# Altium PCB KS2E-IMD-AMS-LATCH.PcbDoc
Units mm, origin at the board's own origin, x right, y up, seen from the top; angles counter-clockwise.
Board outline 47 x 41 mm, 4 copper layers (Top Copper, Signal Layer 1, Signal Layer 2, Bottom Copper), stack 1.57 mm thick; 24 components, 21 nets, 74 pads, 7 vias.
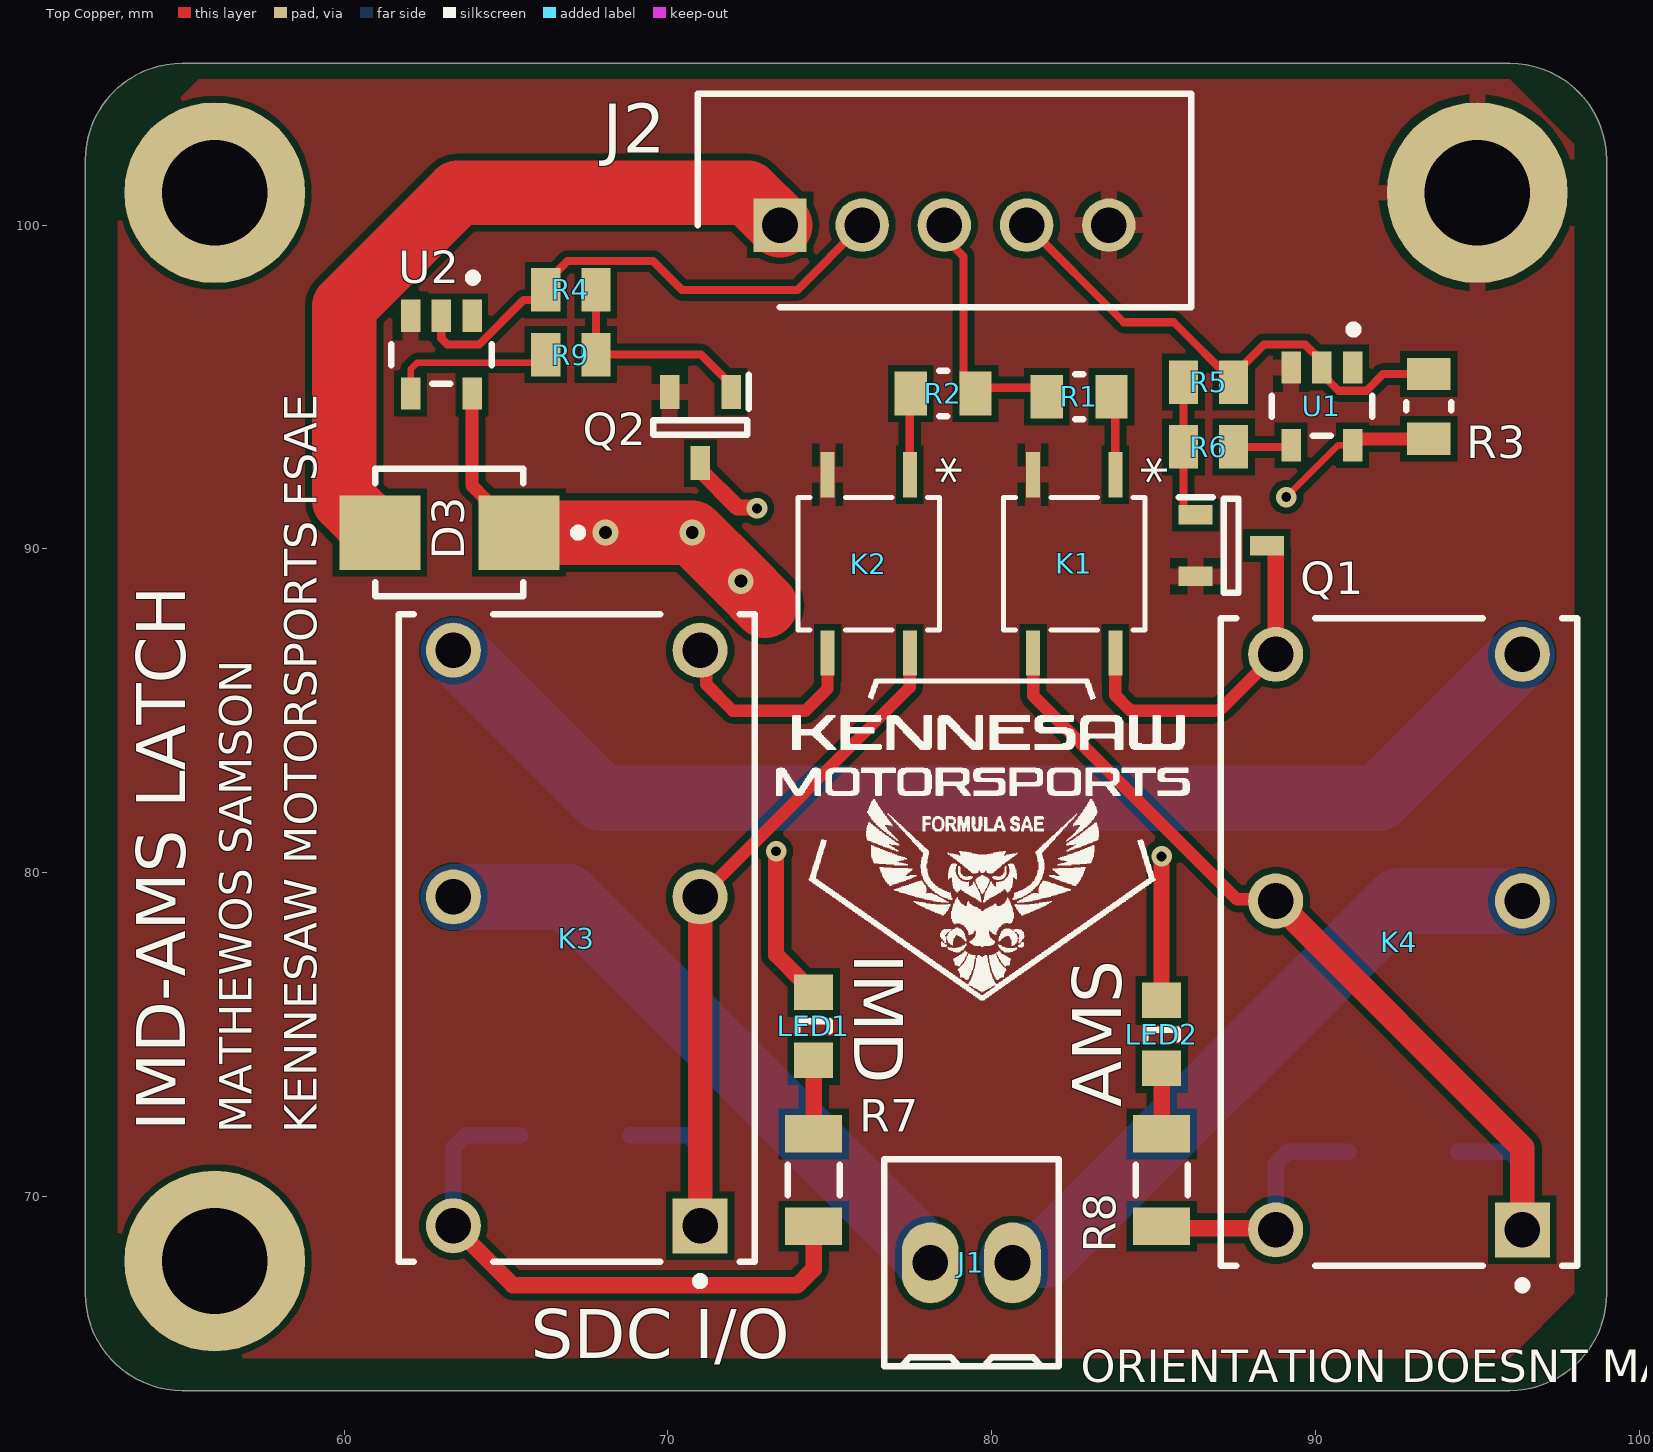
[diagram p0: Top Copper view]
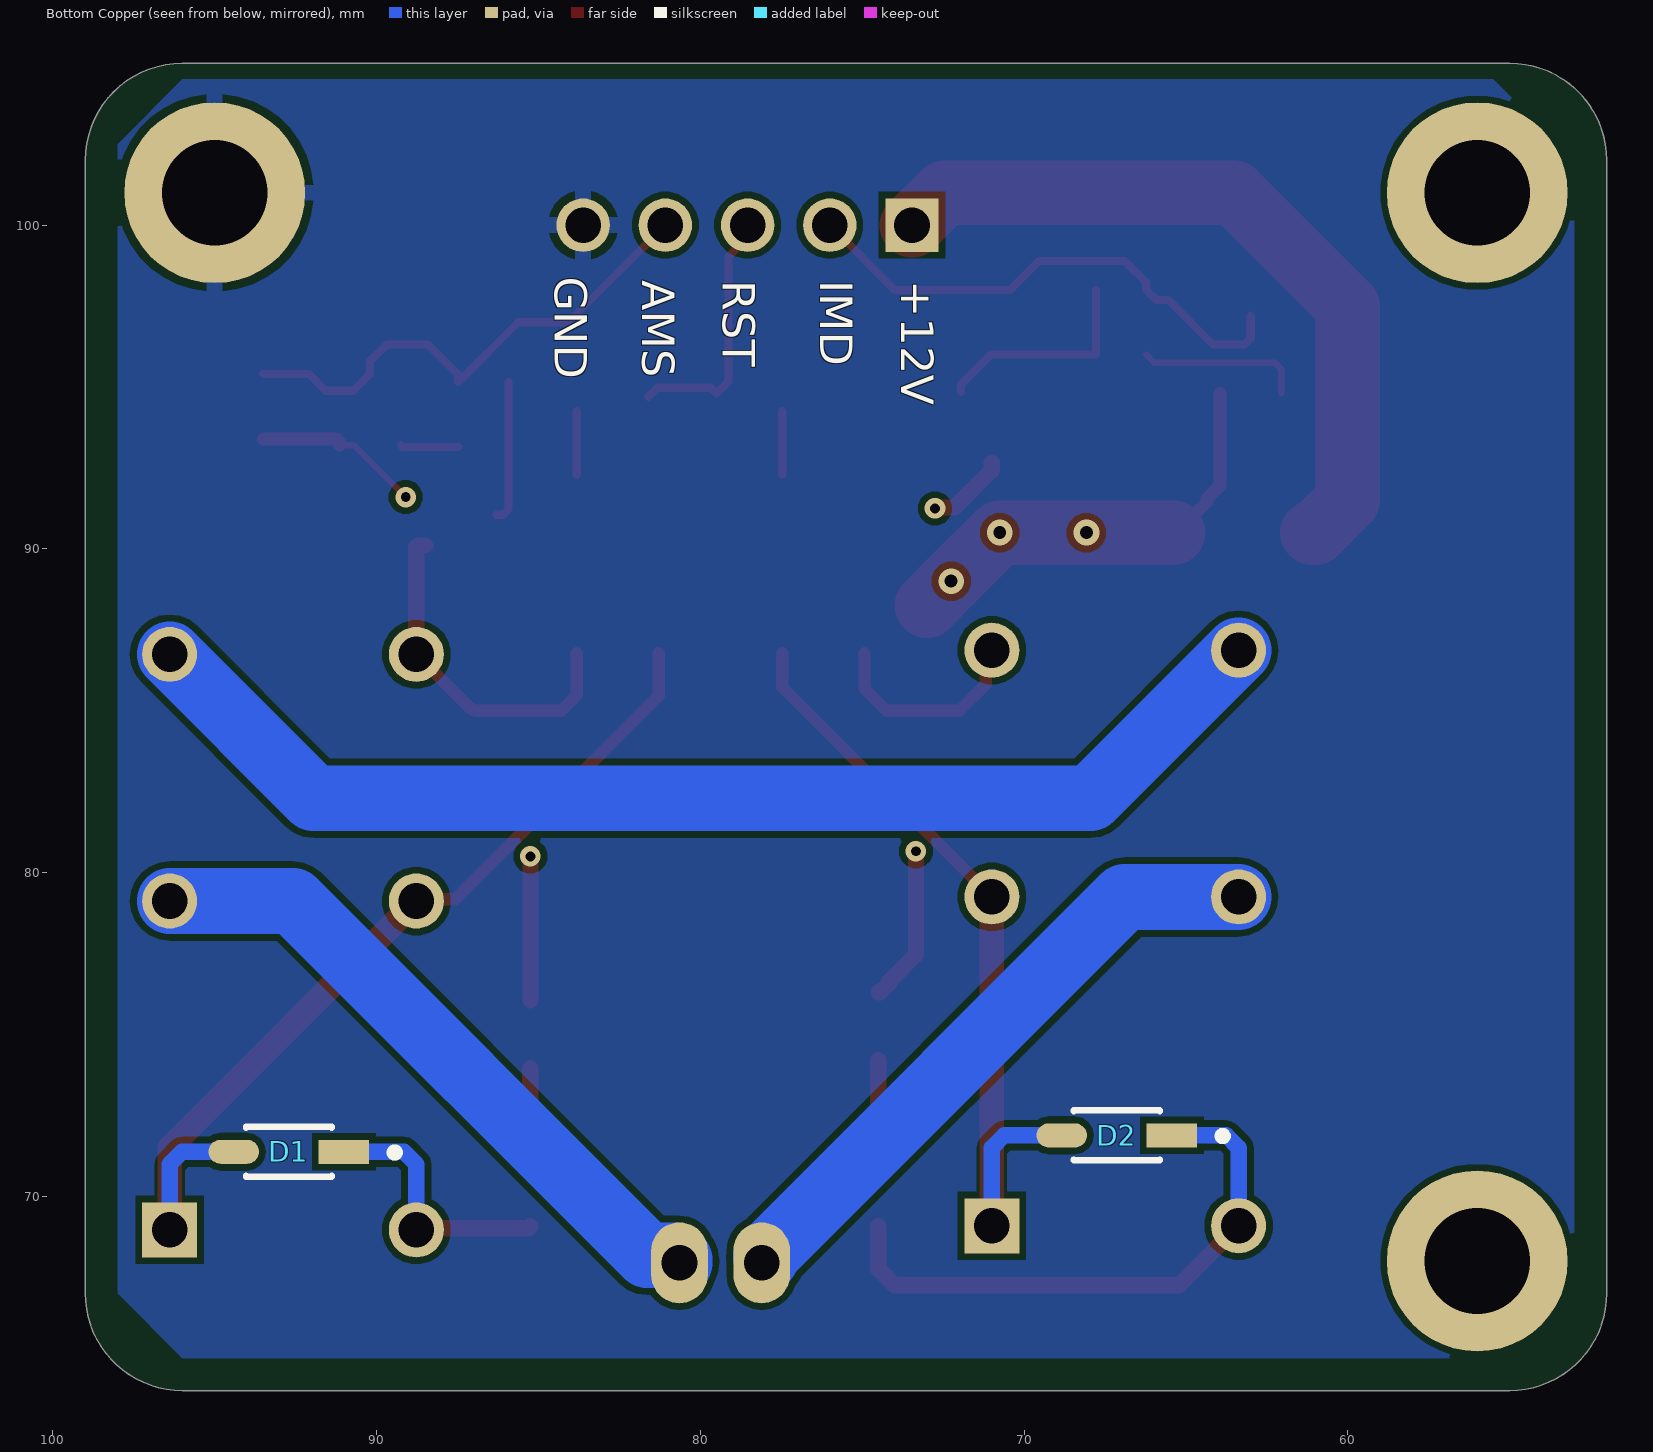
[diagram p1: Bottom Copper view, seen from below]
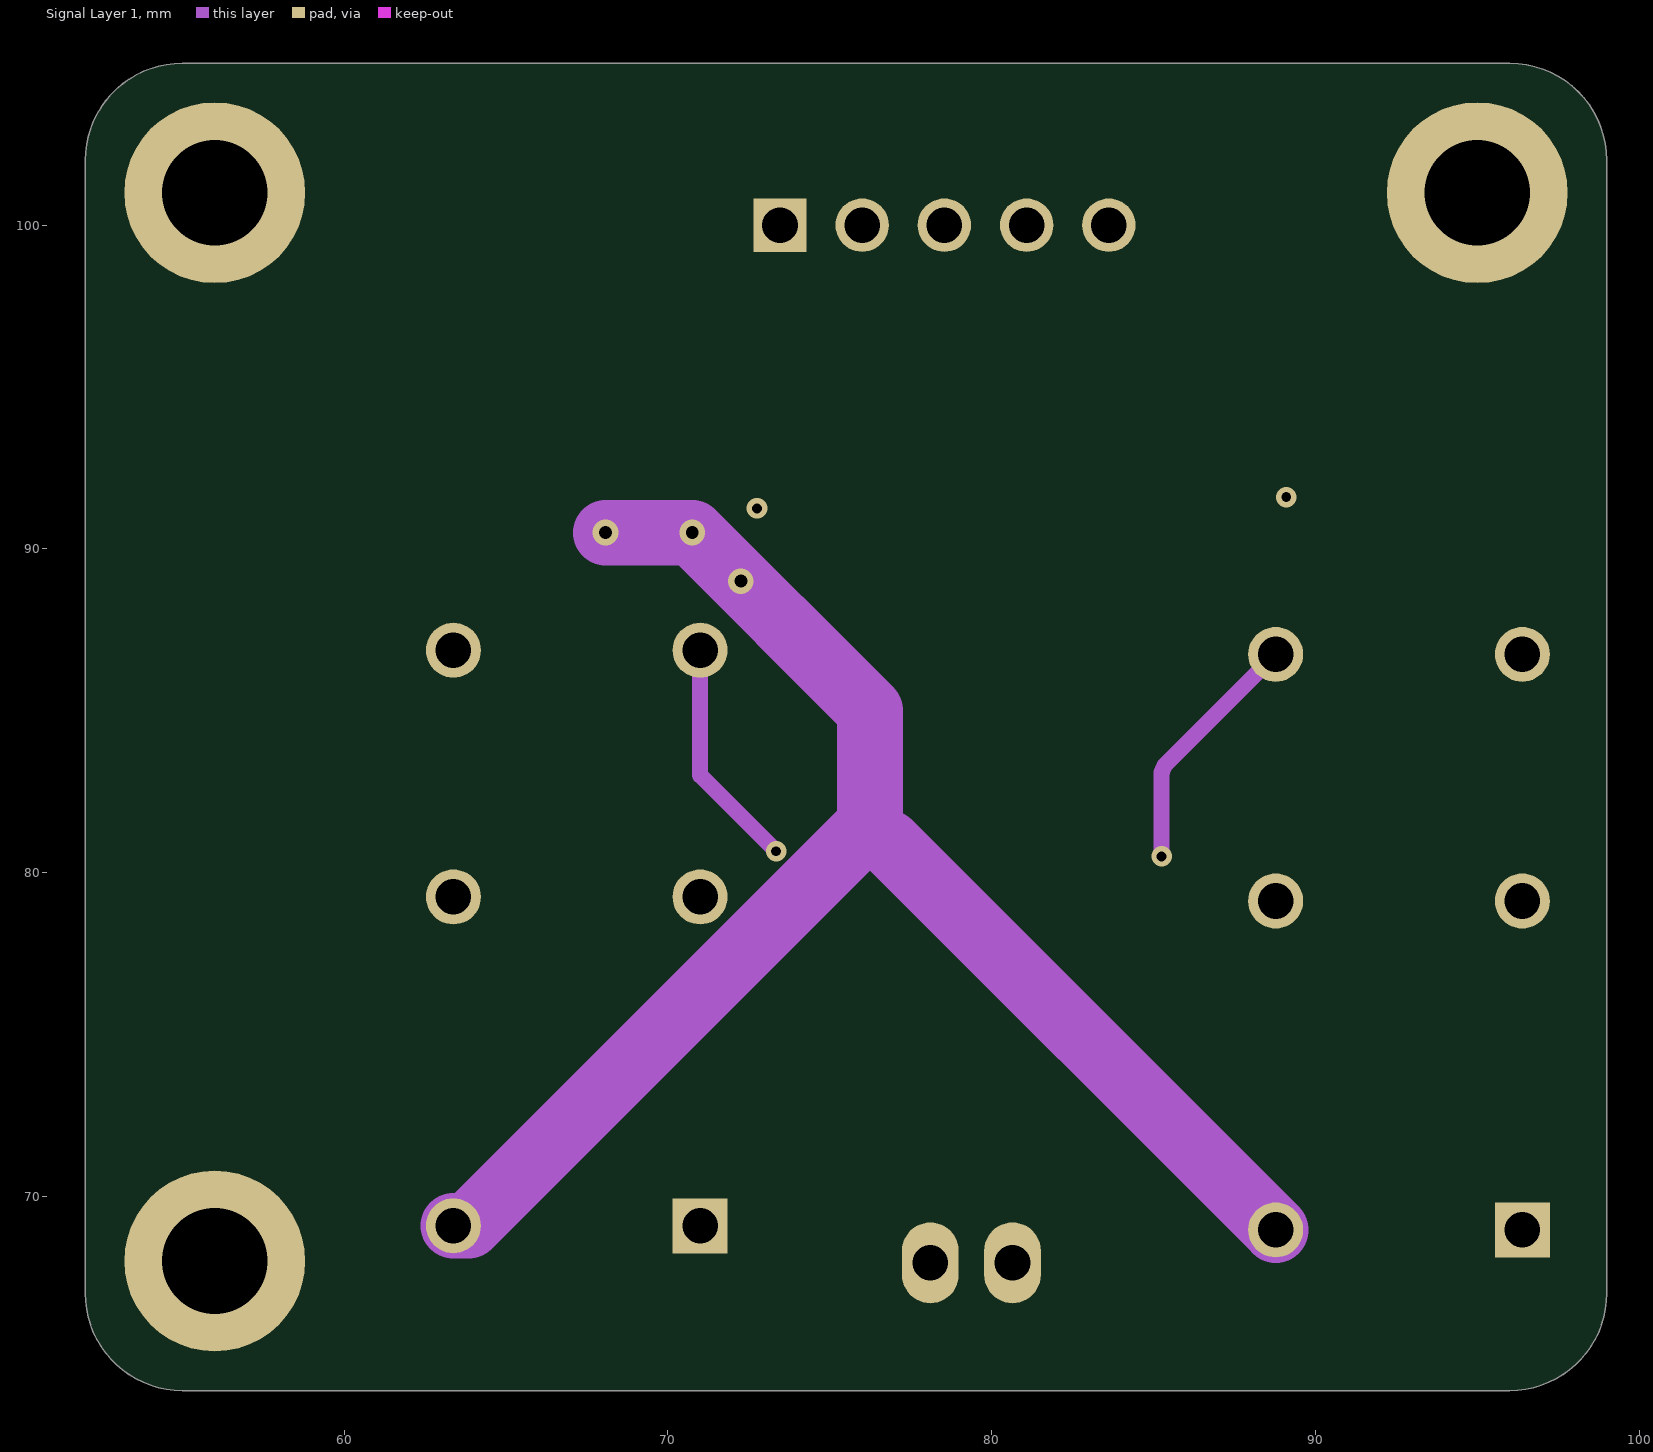
[diagram p2: Signal Layer 1]
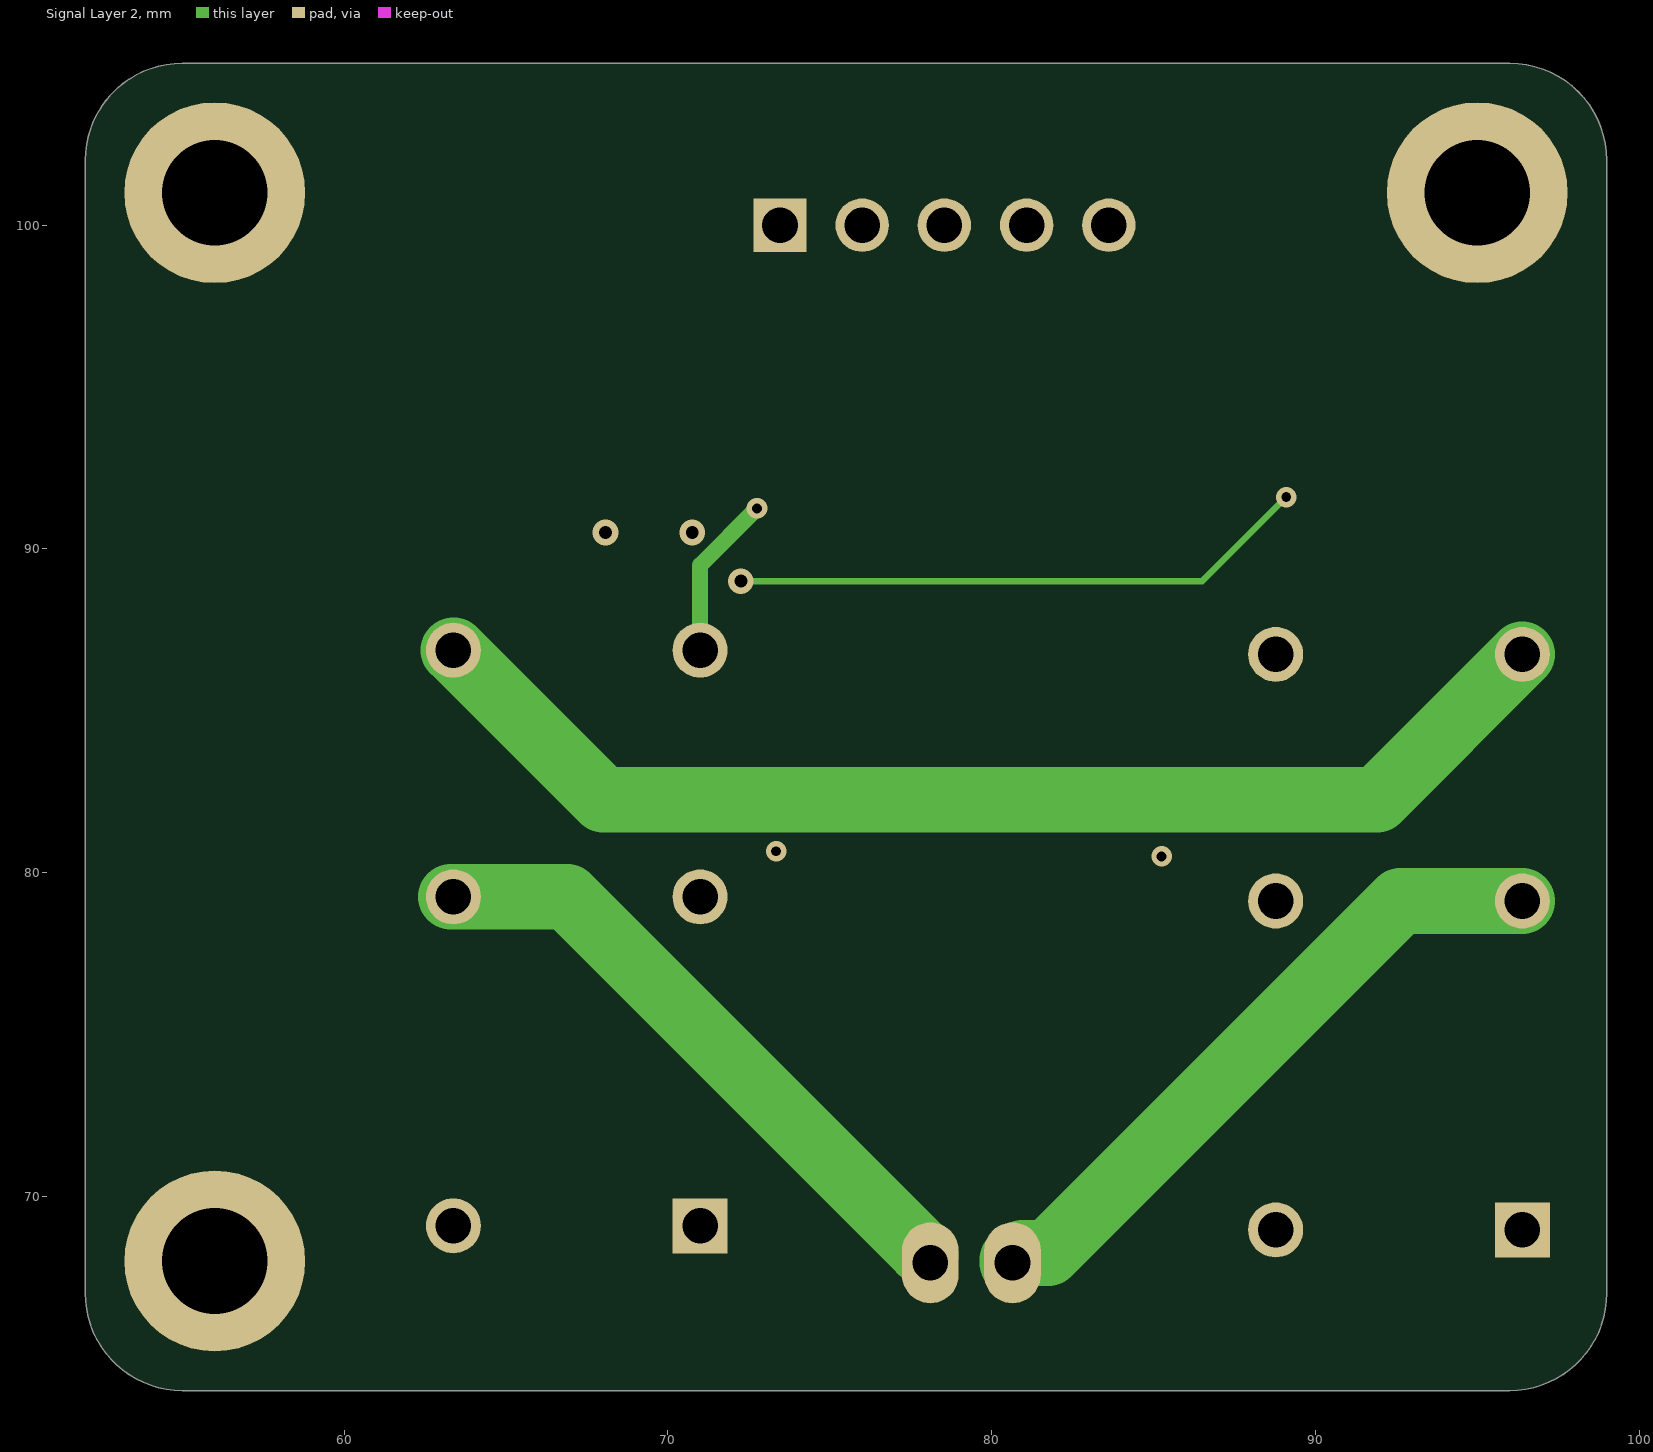
[diagram p3: Signal Layer 2]
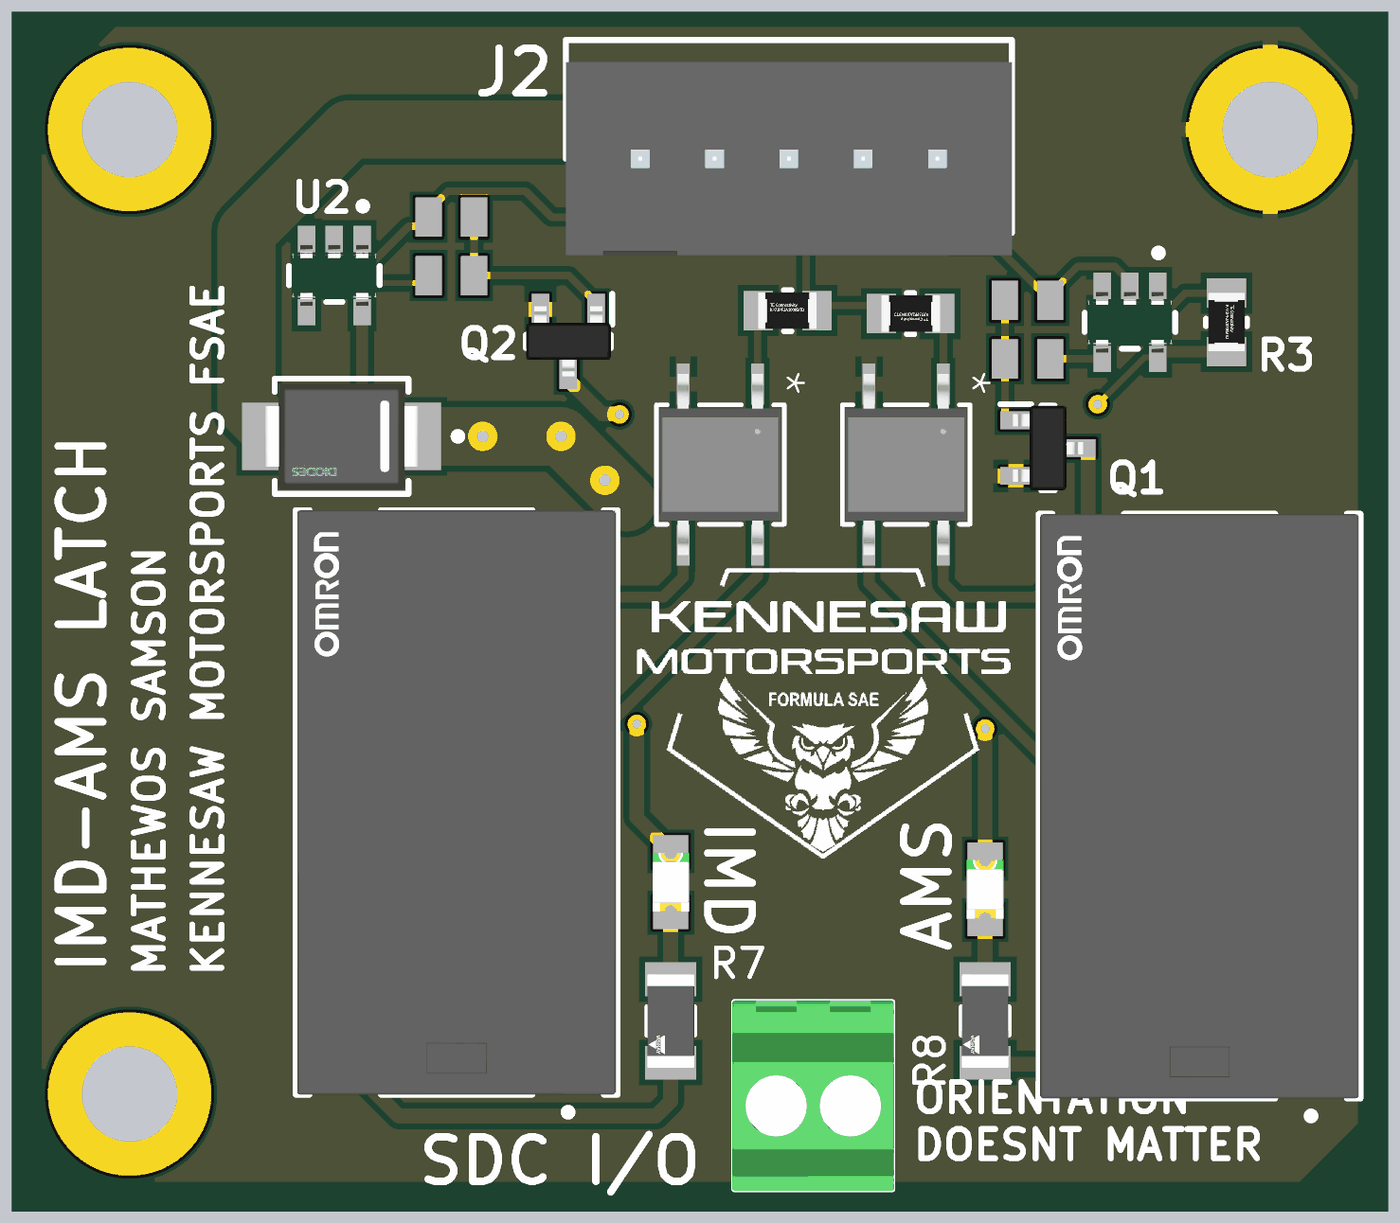
[diagram p4: 3D render of the assembled board from above, using the file's embedded part models]

## Layer stack, top to bottom
Top Mask: solder mask 0.015, Solder Resist, Dk 3.8
Top Copper: signal copper 0.035
Dielectric 1: prepreg 0.1, 2313, Dk 4.05
Signal Layer 1: signal copper 0.0175
Core: core 1.265, FR-4, Dk 4.5
Signal Layer 2: signal copper 0.0175
Dielectric 2: prepreg 0.1, 2313, Dk 4.05
Bottom Copper: signal copper 0.035
Bottom Mask: solder mask 0.015, Solder Resist, Dk 3.8

## Board outline
52,67 52,102 cw(c55,102) 55,105 96,105 cw(c96,102) 99,102 99,67 cw(c96,67) 96,64 55,64 cw(c55,67)

## Design rules (kind name [scope] priority, off if disabled: settings)
BoardOutlineClearance [All] p1: gap=0.2 ignorepadtopadclearanceinfootprint=FALSE except(0.4: Arc-SplitBarrior Arc-SplitContinuation Track-SplitBarrior Track-SplitContinuation SMDPad-SplitBarrior SMDPad-SplitContinuation THPad-SplitBarrior THPad-SplitContinuation Via-SplitBarrior Via-SplitContinuation Fill-SplitBarrior Fill-SplitContinuation Poly-SplitBarrior Poly-SplitContinuation Region-SplitBarrior Region-SplitContinuation Text-SplitBarrior Text-SplitContinuation)
Clearance "Clearance Bottom Layer" [OnLayer('Bottom Layer')] p1: gap=0.203 ignorepadtopadclearanceinfootprint=TRUE except(0.254: Arc-Text Track-Text SMDPad-Text THPad-Text Via-Text Fill-Text Poly-Text Region-Text Text-Text)
Clearance "Clearance Top Layer" [OnLayer('Top Layer')] p2: gap=0.203 ignorepadtopadclearanceinfootprint=TRUE except(0.254: Arc-Text Track-Text SMDPad-Text THPad-Text Via-Text Fill-Text Poly-Text Region-Text Text-Text)
Clearance [All] p3: gap=0.2 ignorepadtopadclearanceinfootprint=FALSE except(0.089: Arc-Arc Arc-Track Arc-SMDPad Track-Track Track-SMDPad SMDPad-SMDPad; 0.127: Arc-Via Track-Via SMDPad-Via THPad-Via Via-Via; 0.254: Arc-Text Track-Text SMDPad-Text THPad-Text Via-Text Fill-Text Poly-Text Region-Text Text-Text)
HoleSize [All] p1: absolutevalues=TRUE maxlimit=6.3 minlimit=0.2 maxpercent=80.000 minpercent=20.000
MinimumAnnularRing [All] p1: minimumring=0.076
MinimumSolderMaskSliver [All] p1: minsoldermaskwidth=0.1
PolygonConnect PolygonConnect_1 [All] p1: thpad.connectstyle=Relief thpad.reliefconductorwidth=0.508 thpad.reliefentries=4 thpad.polygonreliefangle="90 Angle" thpad.airgapwidth=0.254 smdpad.connectstyle=Relief smdpad.reliefconductorwidth=0.508 smdpad.reliefentries=4 smdpad.polygonreliefangle="90 Angle" smdpad.airgapwidth=0.254 via.connectstyle=Direct via.reliefconductorwidth=0.508 via.reliefentries=4 via.polygonreliefangle="90 Angle" via.airgapwidth=0.254
RoutingCorners [All] p1: cornerstyle=Round minsetback=2.54 maxsetback=2.54
RoutingVias [All] p1: holewidth=0.5 width=1 viastyle="Through Hole" minholewidth=0.2 minwidth=0.45 maxholewidth=1 maxwidth=2
SilkToSilkClearance [All] p1: silktosilkclearance=0.1
SilkToSolderMaskClearance [IsPad] p1: minsilkscreentomaskgap=0.1 clearancetoexposedcopper=TRUE
SolderMaskExpansion [All] p1: expansion=0.102 istentingtop=FALSE
Width [All] p1: maxlimit=2.54 minlimit=0.089 preferedwidth=0.381
25 further rules are at their usual default settings.

## Components (designator, comment, footprint, x,y, rotation, side; value= is the part's Value field where it differs from the comment)
D1 "1N5819HW-7-F" FP-SOD123-IPC_A 92.71,71.374 r0 bottom
D2 "1N5819HW-7-F" FP-SOD123-IPC_A 67.134,71.882 r0 bottom
D3 "B260-13-F" FP-SMB-MFG 63.25,90.5 r180 top value=200pF
J1 "282834-2" "TE 282834-2" 79.375,67.945 r180 top
J2 "70543-0004" SHDR5W64P0X254_1X5_1525X660X1181P 73.46,100 r0 top
K1 "CPC1014NTR" CPC1014N_IXY 82.55,89.535 r270 top
K2 "CPC1014NTR" CPC1014N_IXY 76.2,89.535 r270 top
K3 "G6B-2214P-US-DC24" FP-G6B-2214P-US-DC24-MFG 67.183,77.978 r90 top
K4 "G6B-2214P-US-DC24" FP-G6B-2214P-US-DC24-MFG 92.583,77.851 r90 top
LED1 "150080SS75000" 0805_A 74.5,75.25 r270 top
LED2 "150080SS75000" 0805_A 85.25,75 r270 top
Q1 "PMV90ENER" SOT95P230X110-3N 87.4,90.1 r0 top
Q2 "PMV90ENER" SOT95P230X110-3N 71,93.75 r270 top
R1 "RP73PF2A10KBTDF" FP-RP73P-2A-MFG 82.7,94.7 r180 top value=10KΩ
R2 "RP73PF2A10KBTDF" FP-RP73P-2A-MFG 78.5,94.8 r0 top value=10KΩ
R3 "RP73PF2A10KBTDF" FP-RP73P-2A-MFG 93.5,94.4 r270 top value=10KΩ
R4 "CRG0805ZR" RESC2013X65X40LL15T20 67,98 r0 top
R5 "CRG0805ZR" RESC2013X65X40LL15T20 86.7,95.15 r180 top
R6 "CRG0805ZR" RESC2013X65X40LL15T20 86.7,93.15 r180 top
R7 "CRCW1206500RJNEA" FP-CRCW1206-e3-IPC_B 74.5,70.5 r270 top
R8 "CRCW1206500RJNEA" FP-CRCW1206-e3-IPC_B 85.25,70.5 r270 top
R9 "CRG0805ZR" RESC2013X65X40LL15T20 67,96 r0 top
U1 "BU4S584G2-TR" FP-SSOP5-MFG 90.2,94.4 r270 top
U2 "BU4S584G2-TR" FP-SSOP5-MFG 63,96 r270 top

## Footprints (in the part's own frame and the unit in brackets; to place one, negate y for a bottom-side part, rotate by r counter-clockwise, add the part's x,y. Pads: shape width x height; smd on the part's side, far side on the other; paste and mask are expansions set on the pad)
0805_A [mm] "Chip LED, 2-Leads, Body 2.0x1.3mm, IPC Medium Density"
  rect 1.1x1.2 smd: 1(-1.05,0) 2(1.05,0)
  silkscreen extent -0.15,-0.5 0.15,0.5, body extent -1,-0.62 1,0.63, height 0.68
CPC1014N_IXY [mil]
  rect 55x17 smd paste+0 mask+0: 1(-108.5,50) 2(-108.5,-50) 3(108.5,-50) 4(108.5,50)
  silkscreen extent -81,-86 81,86, body extent -122,-81 122,81, height 85
FP-CRCW1206-e3-IPC_B [mm]
  rect 1.156x1.758 smd paste+0 mask+0: 1(-1.426,0) 2(1.426,0)
  silkscreen extent -0.47,-0.8 0.47,0.8, body extent -2.25,-1.13 2.25,1.13, height 0.25
FP-G6B-2214P-US-DC24-MFG [mm]
  rect 1.7x1.7 hole 1.1 paste-1000 mask+0: 1(-8.89,-3.81)
  round 1.7 hole 1.1 paste-1000 mask+0: 3(1.27,-3.81) 4(8.89,-3.81) 5(8.89,3.81) 6(1.27,3.81) 8(-8.89,3.81)
  silkscreen extent -10.72,-5.5 10,5.5, body extent -10.1,-5.6 10.1,5.6, height 0.25
FP-RP73P-2A-MFG [mm]
  rect 1x1.35 smd paste+0 mask+0: 1(-1,0) 2(1,0)
  silkscreen extent -0.13,-0.7 0.13,0.7, body extent -1.6,-0.8 1.6,0.8, height 0.25
FP-SMB-MFG [mm]
  rect 2.5x2.3 smd paste+0 mask+0: 1(-2.15,0) 2(2.15,0)
  silkscreen extent -4.1,-1.97 2.29,1.97, body extent -2.65,-1.81 2.65,1.81, height 2.5
FP-SOD123-IPC_A [mm]
  rect 1.557x0.742 smd paste+0 mask+0: 1(-1.7,0)
  rrect100% 1.557x0.742 smd paste+0 mask+0: 2(1.7,0)
  silkscreen extent -3.39,-0.78 1.33,0.78, body extent -1.83,-0.77 1.83,0.77, height 1.45
FP-SSOP5-MFG [mm]
  rect 1x0.6 smd paste+0 mask+0: 1(-1.2,0.95) 2(-1.2,0) 3(-1.2,-0.95) 4(1.2,-0.95) 5(1.2,0.95)
  silkscreen extent -2.5,-1.55 0.9,1.55, body extent -1.8,-1.65 1.8,1.65, height 0.25
RESC2013X65X40LL15T20 [mm] "Chip Resistor, 2-Leads, Body 2.00x1.30mm, IPC High Density"
  rect 0.9x1.35 smd: 1(-0.775,0) 2(0.775,0)
  body extent -1.07,-0.72 1.07,0.72, height 0.65
SHDR5W64P0X254_1X5_1525X660X1181P [mm]
  rect 1.65x1.65 hole 1.1: 1(0,0)
  round 1.65 hole 1.1: 2(2.54,0) 3(5.08,0) 4(7.62,0) 5(10.16,0)
  silkscreen extent -2.55,-2.54 12.71,4.06, body extent -2.55,-3.3 12.71,3.3, height 11.81
SOT95P230X110-3N [mm]
  rect 1.05x0.6 smd: 1(-1.1,0.95) 2(-1.1,-0.95) 3(1.1,0)
  silkscreen extent -1.63,-1.45 0.23,1.5, body extent -1.2,-1.45 1.2,1.45, height 0.95
"TE 282834-2" [mm]
  oval 1.75x2.5 hole 1.1: 1(-1.27,0) 2(1.27,0)
  silkscreen extent -2.7,-3.2 2.7,3.2, body extent -2.77,-3.25 2.77,3.25, height 10

## Part data
D1 D2: library part CMP-0303-00003-3, "DIODE SCHOTTKY 40V 1A SOD123", Average Rectified Current=1A, Capacitance=110pF, Case/Package=SOD-123-2, Forward Voltage=450mV, Max Forward Surge Current (Ifsm)=25A, Max Operating Temperature=125°C, Max Power Dissipation=450mW, Max Repetitive Reverse Voltage (Vrrm)=40V, Min Operating Temperature=-65°C, Package Quantity=3000, Peak Reverse Current=50uA, Contact Plating=Tin, Current Rating=1A, Element Configuration=Single, Forward Current=1A, Height=1.25mm, Lead Free="Lead Free", Length=2.85mm, Max Reverse Voltage (DC)=40V, Number of Pins=2, Output Current=1A, Packaging="Tape and Reel", Peak Non-Repetitive Surge Current=25A, Polarity=Standard, Radiation Hardening=No, REACH SVHC="No SVHC", Termination=SMD/SMT, Voltage Rating (DC)=40V, Weight=0.000353oz, Width=1.7mm
D3: library part CMP-12790-000014-1, "DIODE SCHOTTKY 60V 2A SMB", Capacitance=200pF, Forward Current=2A, Manufacturer="Diodes Inc.", Max Junction Temp=+150°C, Max Repetitive Reverse Voltage=60V, Max Surge Forward Current=50A, Package=SMB, Peak Reverse Current=0.5mA, Temperature="-65°C to +150°C", Temperature Range Low=-65°C, Automotive=No, Category=Diode, ComponentLink2Description=Datasheet, ComponentLink2URL=https://www.diodes.com/assets/Datasheets/ds13004.pdf, Device Class L1="Discrete Semiconductors", Device Class L2=Diodes, Device Class L3="Schottky Diodes", Digikey Description="DIODE SCHOTTKY 60V 2A SMB", Footprint Url=https://www.diodes.com/assets/Package-Files/SMB.pdf, Height=2.5mm, Lead Free=Yes, Manufacturer Part Number=B260-13-F, Mouser Description="Schottky Diodes & Rectifiers 60V 2A", Octopart=https://octopart.com/b260-13-f-diodes+inc.-325789, Reverse Voltage=60V, RoHS=TRUE, Standoff Height=0.05mm, Temperature Range High=+150°C
J1: "TERM BLK 2P SIDE ENT 2.54MM PCB", Color=Green, Current=10A, Manufacturer="TE Connectivity AMP Connectors", Supplier Part Number 1=A98333-ND, Voltage=150V, ComponentLink1Description=Datasheet, ComponentLink1URL=https://www.te.com/commerce/DocumentDelivery/DDEController?Action=srchrtrv&DocNm=282834&DocType=Customer+Drawing&DocLang=English, ComponentLink2Description="DigiKey Link", ComponentLink2URL=http://digikey.com/product-detail/en/te-connectivity-amp-connectors/282834-2/A98333-ND/1150135, LastUpdated="1/15/2020 4:15:38 AM", Lifecycle Status=Active, Mating Orientation="Horizontal with Board", Minimum Order=1, Mounting Type="Through Hole", Number of Levels=1, Packaging=Bulk, Part Number=282834-2, Part Status=Active, Pitch="0.100\" (2.54mm)", Positions Per Level=2, Price=0.88, Series=Buchanan, Supplier 1=DigiKey, Wire Gauge="16-30 AWG", Wire Termination="Screw - Rising Cage Clamp"
J2: "Connector", Manufacturer_Name=Molex, Mouser Part Number=538-70543-0004, Datasheet Link=https://componentsearchengine.com/Datasheets/2/70543-0004.pdf, Height=11.81mm, Manufacturer_Part_Number=70543-0004, Mouser Price/Stock=https://www.mouser.co.uk/ProductDetail/Molex/70543-0004?qs=ZwgtpdmWYYQRmWofVdhxiw%3D%3D
K1 K2: "No Description Available", Mfr_Name="Littelfuse Inc", Copyright="Copyright (C) 2022 Ultra Librarian. All rights reserved.", Digi-Key_Part_Number_1=CLA314TR-ND, Digi-Key_Part_Number_2=CLA314CT-ND, Digi-Key_Part_Number_3=CLA314DKR-ND, Manufacturer_Part_Number=CPC1014NTR, RefDes=RefDes, Type=DEV
K3 K4: library part CMP-08822-000243-1, "RELAY GEN PURPOSE DPST 5A 24V", Case/Package=DIP, Coil Current=8.3mA, Coil Power=300mW, Coil Resistance=2.88kR, Coil Voltage (DC)=24V, Contact Current Rating=5A, Max Operating Temperature=70°C, Max Voltage Rating (AC)=380V, Max Voltage Rating (DC)=125V, Min Operating Temperature=-25°C, Package Quantity=100, Power Consumption=200mW, Approvals=UL, Coil Type=Non-Latching, Contact Material=Silver, Current Rating=5A, Depth=11mm, Height=10mm, Lead Free="Lead Free", Length=20mm, Max Current Rating=5A, Mount="Through Hole", Number of Pins=6, Operate Time=10ms, Packaging=Bulk, Radiation Hardening=No, Relay Type="General Purpose", Release Time=10ms, Series=G6B, Termination="PC Pin", Throw Configuration=DPST, Voltage Rating (AC)=380V, Voltage Rating (DC)=125V, Weight=0.141096oz, Width=10mm
LED1 LED2: library part CMP-1426-00010-1, "SMD mono-color Chip LED, WL-SMCW, Super Red", Color="Super Red", Manufacturer="Wuerth Elektronik", ComponentLink1Description="Manufacturer URL", ComponentLink1URL=http://www.we-online.com, ComponentLink2Description=Datasheet, ComponentLink2URL=http://katalog.we-online.com/led/datasheet/150080SS75000.pdf, PackageReference=0805_A, PartNumber=150080SS75000
Q1 Q2: "MOSFET (N-Channel)", Manufacturer_Name=Nexperia, Mouser Part Number=771-PMV90ENER, Arrow Part Number=PMV90ENER, Arrow Price/Stock=https://www.arrow.com/en/products/pmv90ener/nexperia, Datasheet Link=https://assets.nexperia.com/documents/data-sheet/PMV90ENE.pdf, Height=1.1mm, Manufacturer_Part_Number=PMV90ENER, Mouser Price/Stock=https://www.mouser.co.uk/ProductDetail/Nexperia/PMV90ENER?qs=gH1BdSMZm8U46al1TitK1w%3D%3D
R1 R2 R3: library part CMP-03211-008023-1, "RP73P 0805 10KΩ 0.25W 25ppm/°C 0.10% 150V", Manufacturer="TE Connectivity", Package=RP73P-2A, Power Rating=0.25W, Resistance=10KΩ, Temperature="-55°C to +155°C", Temperature Coefficient=25ppm/°C, Temperature Range High=+155°C, Temperature Range Low=-55°C, Tolerance=0.001, Voltage Rating=150V, Automotive=No, Category=Res, ComponentLink2Description=Datasheet, ComponentLink2URL=https://www.te.com/commerce/DocumentDelivery/DDEController?Action=srchrtrv&DocNm=1773272&DocType=DS&DocLang=English, Composition="Thin Film", Device Class L1="Passive Components", Device Class L2=Resistors, Device Class L3="Chip SMD Resistors", Height=0.65mm, Ipc Land Pattern Name=RESC200125X55, Lead Free=Yes, Manufacturer Part Number=RP73PF2A10KBTDF, Octopart=https://octopart.com/2176093-5-te+connectivity-46441071, RoHS=TRUE, Series=RP73P
R4 R5 R6 R9: library part CMP-2000-07514-1, "Chip Resistor, 0 Ohm, 0.125 W, -55 to 125 degC, 0805 (2012 Metric), RoHS, Tape and Reel", Case Code (Imperial)=0805, Case Code (Metric)=2012, Manufacturer="TE Connectivity", Max Operating Temperature=125degC, Min Operating Temperature=-55degC, Number of Resistors=1, Package Description="2-Pin Surface Mount Device, Body 2 x 1.25 mm", Package Quantity=5000, Package Reference=RESC2013X65X40L15T20, Power Rating=125mW, Resistance=0mOhm, Tolerance=0%, Voltage Rating=150V, Case\/Package=0805, Composition=ThickFilm, Datasheet URL=www.te.com/commerce/DocumentDelivery/DDEController?Action=showdoc&DocId=Customer+Drawing%7F1623401%7FBA%7Fpdf%7FEnglish%7FENG_CD_1623401_BA.pdf%7F1623401-1, Datasheet Version="Rev. BA, 12/2009", Depth=1.25mm, ELV=Compliant, Height=0.55mm, Length=2mm, Manufacturer URL=http://www.te.com/, Mount=SurfaceMount, Mounting Technology=SurfaceMount, Number of Terminations=2, Packaging=TapeandReel, Radiation Hardening=No, RoHSCompliant=true, Termination=Solder, Weight=0.000194oz, Width=1.25mm
R7 R8: library part CMP-02407-007735-1, "RES Thick Film, 500Ω, 5%, 0.25W, 200ppm/°C, 1206", Case/Package=1206, Max Operating Temperature=155°C, Min Operating Temperature=-55°C, Resistance=500R, Temperature Coefficient=200ppm/°C, Tolerance=5%, Composition="Thick Film", Contact Plating=Tin, Lead Free="Lead Free", Packaging="Tape and Reel", Radiation Hardening=No
U1 U2: library part CMP-08923-000001-1, "IC INVERTER SCHMITT 1CH 5SSOP", Manufacturer=Rohm, Max Junction Temp=+150°C, Max Supply Voltage=16V, Min Supply Voltage=3V, Package=SSOP5, Quiescent Current=0.2-1uA, Temperature="-40°C to +85°C", Temperature Range High=+85°C, Temperature Range Low=-40°C, Automotive=No, Category=IC, ComponentLink2Description=Datasheet, ComponentLink2URL=https://www.rohm.com/datasheet/BU4S584G2/bu4s584g2-e, Device Class L1="Integrated Circuits (ICs)", Device Class L2="Logic ICs", Device Class L3="Logic Gates", Digikey Description="IC INVERTER SCHMITT 1CH 5SSOP", Footprint Url=https://d1d2qsbl8m0m72.cloudfront.net/en/techdata_basic/ic/package/ssop5_1-e.pdf, Height=1.25mm, Ipc Land Pattern Name=SOT95P280X125-5, Lead Free=Yes, Logic Function Desc=Inverting, Manufacturer Part Number=BU4S584G2-TR, Mouser Description="Inverters IC SCHMITT TRIGGER SINGLE", Number of Circuits=1, Number Of Inputs=1, Number Of Outputs=1, Octopart=https://octopart.com/bu4s584g2-tr-rohm-466637, Propagation Delay=50ns, RoHS=TRUE, Standoff Height=0mm

## Free pads (board coordinates)
  round 5.588 hole 3.264 unplated: 2(56,68) 2(56,101)
  round 5.588 hole 3.264: 3(95,101)

## Via types
v1: diameter 0.635, hole 0.305, Top Copper to Bottom Copper, 4 vias
v2: diameter 0.8, hole 0.4, Top Copper to Bottom Copper, 3 vias

## Nets (pads, with @x,y where several pads share a name; then routed paths per layer and width w, separated by ;. In a path a pad name is that pad's centre, name@x,y a point inside that pad or via, vN(x,y) a via of type N, cw(c..) or ccw(c..) an arc to the next point about the centre after c; other vN are vias at no path point)
+12V: D1.1 D2.1 D3.1 K3.8 K4.8 R3.2 R7.2 R8.2 U1.5 U2.5 | length 111.5
  Top Copper w0.2: v1(89.1,91.6) 90.7,93.2 U1.5
  Top Copper w0.4: U2.5 63.95,91.95 64.35,91.55 64.35,91.45 65.3,90.5 D3.1 ; U1.5 91.15,93.3 91.25,93.4 R3.2
  Top Copper w0.508: K3.8 65.211,67.25 74,67.25 74.5,67.75 R7.2 ; R8.2 85.306,69.017 88.717,69.017 K4.8
  Top Copper w2: D3.1 v2(68.075,90.5) 68.537,90.5 v2(70.75,90.5) v2(72.25,89) 73,88.25
  Signal Layer 1 w2.032: K3.8 63.838,69.088 76.242,81.492 76.242,85.008 74.621,86.629 v2(72.25,89) v2(70.75,90.5) 68.538,90.5 v2(68.075,90.5) ; 76.835,80.899 K4.8
  Signal Layer 2 w0.2: v2(72.25,89) 86.5,89 v1(89.1,91.6)
  Bottom Copper w0.508: K3.8 63.373,71.501 63.754,71.882 D2.1 ; K4.8 88.773,70.993 89.154,71.374 D1.1
+GLV: D3.2 J2.1 | length 22.8
  Top Copper w2: D3.2 61,90.5 60,91.5 60,97.49 63.51,101 72.46,101 J2.1
AMS_COIL: D1.2 K1.3 K4.1 K4.6 | length 28.9
  Top Copper w0.381: K1.3 81.28,85.47 87.577,79.173 88.721,79.173 K4.6
  Top Copper w0.762: K4.6 96.393,71.501 K4.1
  Bottom Copper w0.508: D1.2 96.012,71.374 96.393,70.993 K4.1
AMS_DRAIN: K1.4 K4.5 LED2.1 Q1.3 | length 22.9
  Top Copper w0.381: K1.4 83.82,86.271 83.82,85.963 83.82,85.473 84.221,85.072 84.224,85.072 84.296,85 84.417,85 86.874,85 ccw(c86.874,85.381) 87.144,85.112 K4.5
  Top Copper w0.5: LED2.1 v1(85.25,80.5) ; Q1.3 88.723,90.1 88.773,90.05 K4.5
  Signal Layer 1 w0.5: v1(85.25,80.5) 85.25,83.012 cw(c85.75,83.011) 85.396,83.364 K4.5
AMS_ERROR: Q1.1 R5.2 R6.2 | length 4.4
  Top Copper w0.254: R5.2 R6.2 85.925,91.223 86.098,91.05 Q1.1
AMS_IN: J2.4 R3.1 R5.1 U1.2 | length 16.1
  Top Copper w0.254: J2.4@81.056,100.024 84.08,97 85.625,97 R5.1 87.475,95.375 88.416,96.316 89.684,96.316 90.2,95.8 U1.2 90.2,95.4 90.716,94.884 91.576,94.884 92.092,95.4 R3.1
AMS_RESET: K1.1 R1.1 | length 2
  Top Copper w0.254: K1.1 R1.1@83.82,94.25
GND: J2.5 K1.2 K2.2 pad.3 Q1.2 Q2.2 U1.3 U2.3
IMD_COIL: D2.2 K2.4 K3.1 K3.3 | length 25.1
  Top Copper w0.254: K3.1 70.993,70.04
  Top Copper w0.381: K3.3 77.47,85.725 K2.4
  Top Copper w0.762: 70.993,70.04 K3.3
  Bottom Copper w0.508: D2.2 70.612,71.882 70.993,71.501 K3.1
IMD_DRAIN: K2.3 K3.4 LED1.1 Q2.3 | length 26.3
  Top Copper w0.381: K3.4 71.187,86.674 71.187,85.813 72,85 74.25,85 74.93,85.68 K2.3
  Top Copper w0.481: K3.4@70.949,86.912 K3.4
  Top Copper w0.5: Q2.3 71,92.425 72.149,91.276 72.724,91.276 v1(72.75,91.25) ; v1(73.342,80.658) 73.342,77.458 74.15,76.65 74.15,76.6 74.45,76.3 LED1.1
  Signal Layer 1 w0.5: K3.4 70.993,83.007 v1(73.342,80.658)
  Signal Layer 2 w0.5: K3.4 70.993,89.493 v1(72.75,91.25)
IMD_ERROR: Q2.1 R4.2 R9.2 | length 6.8
  Top Copper w0.254: R4.2 R9.2 71.025,96 71.95,95.075 Q2.1
IMD_IN: J2.2 R4.1 U2.2 | length 16.2
  Top Copper w0.254: U2.2 63,96.5 63.184,96.316 64.171,96.316 65.543,97.687 65.912,97.687 R4.1 66.225,98.225 66.891,98.891 69.539,98.891 70.43,98 74,98 J2.2
IMD_RESET: K2.1 R2.1 | length 2
  Top Copper w0.254: K2.1 R2.1@77.47,94.25
NetLED1_2: LED1.2 R7.1 | length 2.3
  Top Copper w0.508: R7.1 LED1.2
NetLED2_2: LED2.2 R8.1 | length 2
  Top Copper w0.508: R8.1 LED2.2
NOT_AMS_IN: R6.1 U1.4 | length 1.8
  Top Copper w0.254: R6.1 89.2,93.15 U1.4
NOT_IMD_IN: R9.1 U2.4 | length 5.1
  Top Copper w0.2: U2.4 62.05,95.55 62.25,95.75 65.975,95.75 R9.1
RESET: J2.3 R1.2 R2.2 | length 7.9
  Top Copper w0.254: J2.3 78.54,99.622 79.127,99.035 79.127,95.173 R2.2 79.675,94.975 81.327,94.975 81.6,94.702 R1.2@81.6,94.7
SDC+: J1.2 K3.6 | length 38.7
  Signal Layer 2 w2.032: K3.6@63.301,79.25 66.891,79.25 77.821,68.32 77.823,68.32 J1.2@77.964,68.179
  Bottom Copper w0.254: J1.2@77.978,68.072 J1.2
  Bottom Copper w2.032: K3.6 66.895,79.248 77.978,68.165 J1.2@77.978,68.072
SDC-: J1.1 K4.3 | length 40.9
  Signal Layer 2 w2.032: J1.1 80.645,68.038 80.786,68.179 80.879,68.179 80.95,68.25 81.75,68.25 92.621,79.121 K4.3
  Bottom Copper w2.032: J1.1 80.645,68.038 80.786,68.179 81.641,68.179 92.583,79.121 K4.3
SDC_ROUTED: K3.5 K4.4 | length 73.5
  Signal Layer 2 w2.032: K3.5 63.382,86.868 68,82.25 91.902,82.25 K4.4
  Bottom Copper w2.032: K3.5 67.945,82.296 91.948,82.296 K4.4
pads on no net: U1.1 U2.1

## Polygon pours and split planes (outlines as drawn)
GND on Top Copper "GND_L01_P000" (solid, pour order 0): 55.5,104.5 53,102 53,67 55,65 96,65 98,67 98,102.5 96,104.5
GND on Bottom Copper "GND_L04_P001" (solid, pour order 1): 55.5,104.5 53,102 53,67 55,65 96,65 98,67 98,102.5 96,104.5

## Silkscreen, mask and mechanical layers (free items; w line width, h text height)
Top Overlay:
  drawing of 73 lines, arcs and shapes, not listed
  text "IMD" at 75.754,77.496 h1.52 r270
  text "AMS" at 83.996,72.754 h1.52 r90
  text "IMD-AMS LATCH" at 55.096,72.004 h1.52 r90
  text "MATHEWOS SAMSON" at 57.15,71.95 h1 r90
  text "KENNESAW MOTORSPORTS FSAE" at 59.15,71.95 h1 r90
  text "SDC I/O" at 65.754,65.004 h1.52
  text "ORIENTATION DOESNT MATTER" at 82.75,64.25 h1
Bottom Overlay:
  text "GND" at 84.5,98.4 h1 r90
  text "+12V" at 73.8,98.3 h1 r90
  text "IMD" at 76.3,98.3 h1 r90
  text "RST" at 79.3,98.3 h1 r90
  text "AMS" at 81.8,98.3 h1 r90
Mechanical 1:
  lines w0.254: 52,67 ccw(c55,67) 55,64 96,64 ccw(c96,67) 99,67 99,102 ccw(c96,102) 96,105 55,105 ccw(c55,102) 52,102 52,67 ; 52,67 52,67

## Text inside footprints (layer, text, board x,y; h text height)
K1: Top Overlay "*" at 84.125,92.862 h1.27 r270; Mechanical 13 "*" at 83.261,91.389 h1.27 r270
K2: Top Overlay "*" at 77.775,92.862 h1.27 r270; Mechanical 13 "*" at 76.911,91.389 h1.27 r270